# EAGLE board OSPID4 (EAGLE 6.4)

Size 101.6 x 81.28 mm. Coordinates in mm from the lower left corner, seen from the top.
Outline: 0,0 101.6,0 101.6,81.28 0,81.28 0,0
Copper layers (1*16): Top 0.035mm / dielectric 1.5mm / Bottom 0.035mm
Design rules "default *": minimum track width 10mil, minimum drill 24mil, track to track 16mil, track to pad 8mil, pad to pad 16mil, via to via 8mil, smd to smd 8mil, copper to edge 25mil, drill to drill 16mil, minimum pad ring 10mil, minimum via ring 8mil, stop-mask expansion 4mil, vias tented up to drill 0mil, thermal gap 16mil
Net classes: 1 power: width 1.016 mm, clearance 0.305 mm

## Footprints (pad centres in the part's own frame; a part is rotated, then mirrored left to right if it is on the bottom)
AK500/3 = drill 1.321 long: 1 -5.004,0; 2 0,0; 3 5.004,0
DIODEBRIDGE = drill 0.8: + -2.54,2.54; - 2.54,-2.54; AC1 2.54,2.54; AC2 -2.54,-2.54
CPOL-RADIAL-10UF-25V = drill 0.7 pad 1.651 square: 1 1.27,0 | drill 0.7 pad 1.651: 2 -1.27,0
CAP-PTH-SMALL = drill 0.7 pad 1.651: 1 0,0; 2 2.54,0
DIODE-1N4001 = drill 1 pad 1.981: A -5.08,0; C 5.08,0
6PINHEADER = drill 1 octagon: P$1 -6.35,0; P$2 -3.81,0; P$3 -1.27,0; P$4 1.27,0; P$5 3.81,0; P$6 6.35,0
3,6-PAD = drill 3.6 pad 5.842: B3,6 0,0
TO-220-ALT = drill 1.016 long: GND 0,-3.81; IN -2.54,-3.81; OUT 2.54,-3.81 | hole 3.302: 0,11.176
DIL16 = drill 0.813 long: 1 -8.89,-3.81; 2 -6.35,-3.81; 3 -3.81,-3.81; 4 -1.27,-3.81; 5 1.27,-3.81; 6 3.81,-3.81; 7 6.35,-3.81; 8 8.89,-3.81; 9 8.89,3.81; 10 6.35,3.81; 11 3.81,3.81; 12 1.27,3.81; 13 -1.27,3.81; 14 -3.81,3.81; 15 -6.35,3.81; 16 -8.89,3.81
POWER_JACK_PTH_LOCK = drill 2.997 pad 4.115: GND 0.025,6.557; GNDBREAK 3.762,10.7 | drill 3.2 pad 4.115: PWR 0,13.878
2X3_POGO = drill 1.2 pad 1.829 octagon: P$1 0,0; P$2 0,2.54; P$3 2.54,0; P$4 2.54,2.54; P$5 5.08,0; P$6 5.08,2.54
LED5MM = drill 0.813 pad 1.676 octagon: A -1.27,0; K 1.27,0
LED5MM' = drill 0.813 pad 1.88: A -1.27,0; K 1.27,0
AK500/2 = drill 1.321 long: 1 -2.515,0; 2 2.515,0
AK500/4 = drill 1.321 long: 1 -7.518,0; 2 -2.489,0; 3 2.489,0; 4 7.518,0
AXIAL-0.3 = drill 0.9 pad 1.88: P$1 -3.81,0; P$2 3.81,0
SQM_5-10 = drill 1.016 square: P1 -2.54,0; P2 2.54,0
POT_B25U = drill 0.813 long: A 2.54,-0.889; E -2.54,-0.889; S 0,-0.889
TACTILE-PTH = drill 1.016 pad 1.88: 1 -3.251,2.261; 2 3.251,2.261; 3 -3.251,-2.261; 4 3.251,-2.261
ROTARY_ENC_PLAIN = drill 1.016: A 7.493,-2.54; B 7.493,2.54; C 7.493,0; SW+ -6.985,2.54; SW- -6.985,-2.54 | drill 2.286: P$3 0,6.604; P$4 0,-6.604
DIL28-3 = drill 0.813 long: 1 -16.51,-3.81; 2 -13.97,-3.81; 3 -11.43,-3.81; 4 -8.89,-3.81; 5 -6.35,-3.81; 6 -3.81,-3.81; 7 -1.27,-3.81; 8 1.27,-3.81; 9 3.81,-3.81; 10 6.35,-3.81; 11 8.89,-3.81; 12 11.43,-3.81; 13 13.97,-3.81; 14 16.51,-3.81; 15 16.51,3.81; 16 13.97,3.81; 17 11.43,3.81; 18 8.89,3.81; 19 6.35,3.81; 20 3.81,3.81; 21 1.27,3.81; 22 -1.27,3.81; 23 -3.81,3.81; 24 -6.35,3.81; 25 -8.89,3.81; 26 -11.43,3.81; 27 -13.97,3.81; 28 -16.51,3.81
DIL06 = drill 0.813 offset: 1 -2.54,-3.81; 2 0,-3.81; 3 2.54,-3.81; 4 2.54,3.81; 5 0,3.81; 6 -2.54,3.81
TRIAC = drill 1.1: 1 -2.54,0; 2 0,0; 3 2.54,0
DO35-10 = drill 0.813 long: A 5.08,0; C -5.08,0
DIL04 = drill 0.813 offset: 1 -1.27,-3.81; 2 1.27,-3.81; 3 1.27,3.81; 4 -1.27,3.81
LCD-16X2_NOSILK = drill 1.016 pad 1.88 square: 1 -32,15.5 | drill 1.016 pad 1.88: 2 -29.46,15.5; 3 -26.92,15.5; 4 -24.38,15.5; 5 -21.84,15.5; 6 -19.3,15.5; 7 -16.76,15.5; 8 -14.22,15.5; 9 -11.68,15.5; 10 -9.14,15.5; 11 -6.6,15.5; 12 -4.06,15.5; 13 -1.52,15.5; 14 1.02,15.5; 15 3.56,15.5; 16 6.1,15.5 | hole 2.8: -37.5,15.5; -37.5,-15.5; 37.5,15.5; 37.5,-15.5
ALPS_POT = drill 1 pad 1.88 square: P$1 7,-2.5; P$2 7,0; P$3 7,2.5 | drill 2 octagon: P$4 0,-4.4; P$5 0,4.4
HC49U-V = drill 0.813: 1 -2.413,0; 2 2.413,0

## Placement (x,y rotation side)
AUTO-MAN  [AK500/3]  55.56,2.86 0 top
BR41  2W01G  [DIODEBRIDGE]  85.72,61.59 180 top
C1  47uF  [CPOL-RADIAL-10UF-25V]  19.68,76.83 90 top
C2  47uF  [CPOL-RADIAL-10UF-25V]  19.68,69.85 270 top
C3  0.1uF  [CAP-PTH-SMALL]  39.05,23.5 180 top
C4  0.1uF  [CAP-PTH-SMALL]  31.43,9.53 0 top
C5  0.1uF  [CAP-PTH-SMALL]  20.95,65.09 180 top
C6  22pF  [CAP-PTH-SMALL]  34.92,31.11 180 top
C7  22pF  [CAP-PTH-SMALL]  27.94,31.11 180 top
C8  0.22uF  [CAP-PTH-SMALL]  67.63,76.83 0 top
C9  47uF  [CPOL-RADIAL-10UF-25V]  87.95,28.26 180 top
C10  47uF  [CPOL-RADIAL-10UF-25V]  87.95,33.97 180 top
D1  [DIODE-1N4001]  14.61,73.34 270 top
D2  [DIODE-1N4001]  58.1,16.51 270 top
FTDI  FTDI  [6PINHEADER]  8.89,39.69 90 top
H5  MOUNT-PAD-ROUND3.6  [3,6-PAD]  5.08,76.2 0 top
H6  MOUNT-PAD-ROUND3.6  [3,6-PAD]  96.52,76.2 0 top
H7  MOUNT-PAD-ROUND3.6  [3,6-PAD]  96.52,5.08 0 top
H8  MOUNT-PAD-ROUND3.6  [3,6-PAD]  5.08,5.08 0 top
IC1  [TO-220-ALT]  28.57,73.34 270 top
IC2  74LS595N  [DIL16]  27.94,48.26 0 top
J1  POWER_JACKPTH_LOCK  [POWER_JACK_PTH_LOCK]  -3.17,65.72 270 top
JP1  [2X3_POGO]  11.75,19.05 270 top
LED1  [LED5MM]  87.63,3.81 0 top
LED2  [LED5MM']  85.72,69.53 0 top
M3-IN  [AK500/2]  98.74,31.11 90 top
MAINS1  [AK500/4]  98.74,61.59 90 top
R1  330  [AXIAL-0.3]  68.9,23.81 180 top
R2  10K  [AXIAL-0.3]  54.93,16.51 90 top
R3  1M  [AXIAL-0.3]  30.16,23.18 0 top
R4  39  [AXIAL-0.3]  74.93,79.38 180 top
R5  390  [AXIAL-0.3]  62.55,79.38 0 top
R6  100  [AXIAL-0.3]  47.94,26.35 0 top
R7  470  [SQM_5-10]  64.45,65.09 90 top
R8  47K  [SQM_5-10]  75.25,65.09 90 top
R9  15K  [AXIAL-0.3]  47.94,23.5 0 top
R10  22K  [AXIAL-0.3]  68.9,31.43 0 top
R11  22K  [AXIAL-0.3]  68.9,28.89 180 top
R12  2.2K  [AXIAL-0.3]  47.94,29.21 180 top
R13  4.7K  [AXIAL-0.3]  68.9,26.35 180 top
R14  [POT_B25U]  27.94,60.96 0 top
R15  0  [AXIAL-0.3]  44.45,48.26 270 top
S1  [TACTILE-PTH]  63.82,16.51 90 top
SENSOR  [AK500/4]  73.16,2.86 0 top
SPEEDPOT  [AK500/3]  40.64,2.86 0 top
SPINDLE  [AK500/2]  98.74,16.83 90 top
SW1  ROTARTY_ENCODER  [ROTARY_ENC_PLAIN]  83.5,15.88 270 top
U1  ATMEGA328P_PDIP  [DIL28-3]  35.24,16.51 180 top
U2  MOC3022M  [DIL06]  51.44,75.56 270 top
U3  BT139  [TRIAC]  85.72,77.47 180 top
U4  DB3  [DO35-10]  69.85,74.3 180 top
U5  PC817  [DIL04]  51.44,61.28 90 top
U6  LCD-16X2NOSILK  [LCD-16X2_NOSILK]  40.96,40.01 0 top
U$1  [ALPS_POT]  20.95,2.22 90 top
Y1  16MHz  [HC49U-V]  30.16,27.3 0 top

## Library data of the parts
AUTO-MAN M3-IN MAINS1 SENSOR SPEEDPOT SPINDLE = con-ptr500; OC_FARNELL: unknown; OC_NEWARK: unknown
BR41 FTDI U3 = connectors
C1 C2 C8-C10 = SparkFun
C3-C7 = SparkFun-Capacitors
D1 D2 = SparkFun-DiscreteSemi
H5-H8 = holes
IC1 = SparkFun-PowerIC
IC2 U1 = SparkFun-DigitalIC
J1 = SparkFun-Connectors
JP1 = SparkFun-Connectors; PROD_ID: HW-11044
LED1 = adafruit2012
LED2 = SparkFun-LED
R1-R13 R15 = SparkFun-Resistors
R14 = HeaterMeterPI
S1 SW1 U$1 = SparkFun-Electromechanical
U2 = optocoupler; MF: FAIRCHILD SEMICONDUCTOR; MPN: MOC3022-M; OC_FARNELL: 1021086; OC_NEWARK: 58K1956
U4 = diode
U5 = optocoupler; MPN: PC817X4J000F; OC_FARNELL: 9707727; OC_NEWARK: 97K7059
U6 = SparkFun-Displays
Y1 = SparkFun-FreqCtrl

## Nets
CS1: IC2.12 U1.6
DRAIN: J1.GND SENSOR.4
E-BUTTON: SW1.SW+ U1.16
EA: SW1.A U1.14
EB: SW1.B U1.15
GND: C1.2 C2.2 C3.2 C4.1 C5.2 C6.1 C7.2 C9.2 C10.2 FTDI.P$1 FTDI.P$2 H5.B3,6 H6.B3,6 H7.B3,6 H8.B3,6 IC1.GND IC2.8 IC2.13 J1.GNDBREAK JP1.P$6 LED1.K M3-IN.2 R14.A S1.3 S1.4 SENSOR.2 SPEEDPOT.1 SPINDLE.2 SW1.C SW1.SW- U1.8 U1.22 U2.2 U5.3 U6.1 U6.5 U6.16 U$1.P$1
MACH3: AUTO-MAN.1 C10.1 R10.P$2
MACH3_PWM: M3-IN.1 R11.P$1
MAINS_LIVE: BR41.AC1 C8.1 MAINS1.1 R5.P$2 U3.2
MANUAL: AUTO-MAN.3 SPEEDPOT.2 U$1.P$2
MISO: JP1.P$1 U1.18
MOSI: IC2.14 JP1.P$4 U1.17
MOTOR_LIVE: MAINS1.4 R4.P$1 U3.3
N$1: U3.1 U4.C
N$2: C9.1 R10.P$1 R11.P$2
N$3: U2.4 U4.A
N$4: LED1.A R1.P$1
N$5: C8.2 R4.P$2
N$6: R7.P1 R8.P2 U5.1
N$7: BR41.- LED2.K U5.2
N$8: LED2.A R8.P1
N$10: R12.P$1 SPEEDPOT.3 U$1.P$3
N$12: R13.P$1 SPINDLE.1
N$13: R6.P$1 U2.1
N$14: R14.S U6.3
N$15: R5.P$1 U2.6
N$17: R15.P$1 U6.15
N$18: IC2.1 U6.4
N$19: IC2.2 U6.6
N$20: C7.1 R3.P$1 U1.10 Y1.1
N$21: IC2.6 U6.14
N$22: C6.2 R3.P$2 U1.9 Y1.2
N$23: IC2.5 U6.13
N$24: IC2.4 U6.12
N$25: C1.1 D1.C IC1.IN
N$26: D1.A J1.PWR
N$27: IC2.3 U6.11
N$28: C4.2 U1.21
N$29: BR41.+ R7.P2
NEUTRAL: BR41.AC2 MAINS1.2 MAINS1.3
RESET: D2.A FTDI.P$6 JP1.P$5 R2.P$2 S1.1 S1.2 U1.1
RX: FTDI.P$4 U1.2
SCK: IC2.11 JP1.P$3 U1.19
SENSOR: SENSOR.1 U1.24
SPEED: AUTO-MAN.2 U1.23
SPINDLE-ON: R13.P$2 U1.27
TRIAC: R6.P$2 U1.26
TX: FTDI.P$5 U1.3
VCC: C2.1 C3.1 C5.1 D2.C FTDI.P$3 IC1.OUT IC2.10 IC2.16 JP1.P$2 R1.P$2 R2.P$1 R9.P$2 R12.P$2 R14.E R15.P$2 SENSOR.3 U1.7 U1.20 U6.2
ZEROCROSS: R9.P$1 U1.4 U5.4

## Tracks (layer width: path | path; a pad name or v marks a point on that pad's centre or on a via)
CS1  (1 unrouted)
DRAIN  (1 unrouted)
E-BUTTON  (1 unrouted)
EA  (1 unrouted)
EB  (1 unrouted)
GND  (37 unrouted)
MACH3  (2 unrouted)
MACH3_PWM  (1 unrouted)
MAINS_LIVE  (4 unrouted)
MANUAL  (2 unrouted)
MISO  (1 unrouted)
MOSI  (2 unrouted)
MOTOR_LIVE  (2 unrouted)
N$1  (1 unrouted)
N$2  (2 unrouted)
N$3  (1 unrouted)
N$4  (1 unrouted)
N$5  (1 unrouted)
N$6  (2 unrouted)
N$7  (2 unrouted)
N$8  (1 unrouted)
N$10  (2 unrouted)
N$12  (1 unrouted)
N$13  (1 unrouted)
N$14  (1 unrouted)
N$15  (1 unrouted)
N$17  (1 unrouted)
N$18  (1 unrouted)
N$19  (1 unrouted)
N$20  (3 unrouted)
N$21  (1 unrouted)
N$22  (3 unrouted)
N$23  (1 unrouted)
N$24  (1 unrouted)
N$25  (2 unrouted)
N$26  (1 unrouted)
N$27  (1 unrouted)
N$28  (1 unrouted)
N$29  (1 unrouted)
NEUTRAL  (2 unrouted)
RESET  (6 unrouted)
RX  (1 unrouted)
SCK  (2 unrouted)
SENSOR  (1 unrouted)
SPEED  (1 unrouted)
SPINDLE-ON  (1 unrouted)
TRIAC  (1 unrouted)
TX  (1 unrouted)
VCC  (18 unrouted)
ZEROCROSS  (2 unrouted)

## Text on the board
tPlace: N L / Motor | L N / 120v | BEWARE!!!! / MAINS VOLTAGE!!!